# Altium PCB PCB封装.PcbDoc
Units mil, origin at the board's own origin, x right, y up, seen from the top; angles counter-clockwise.
Board outline 6000 x 4000 mil, 2 copper layers (Top, Bottom), stack 12.7 mil thick; 1 components, 0 nets, 26 pads, 0 vias.
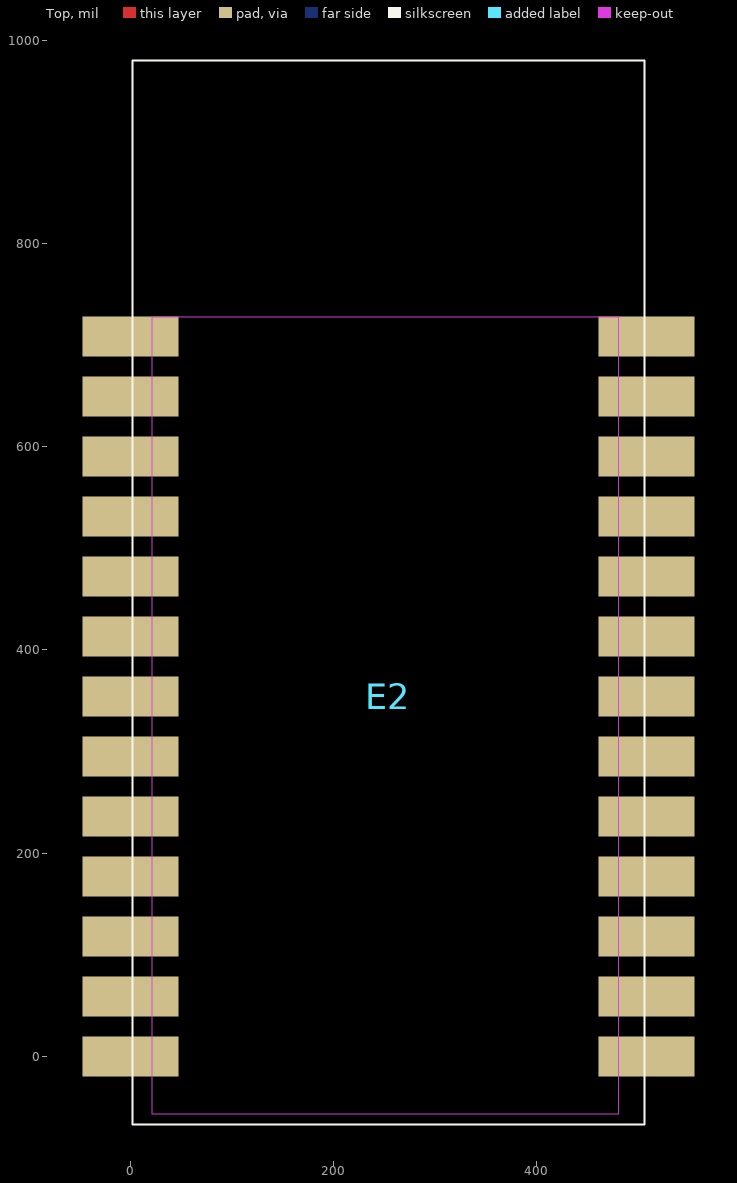
[diagram p0: Top view]
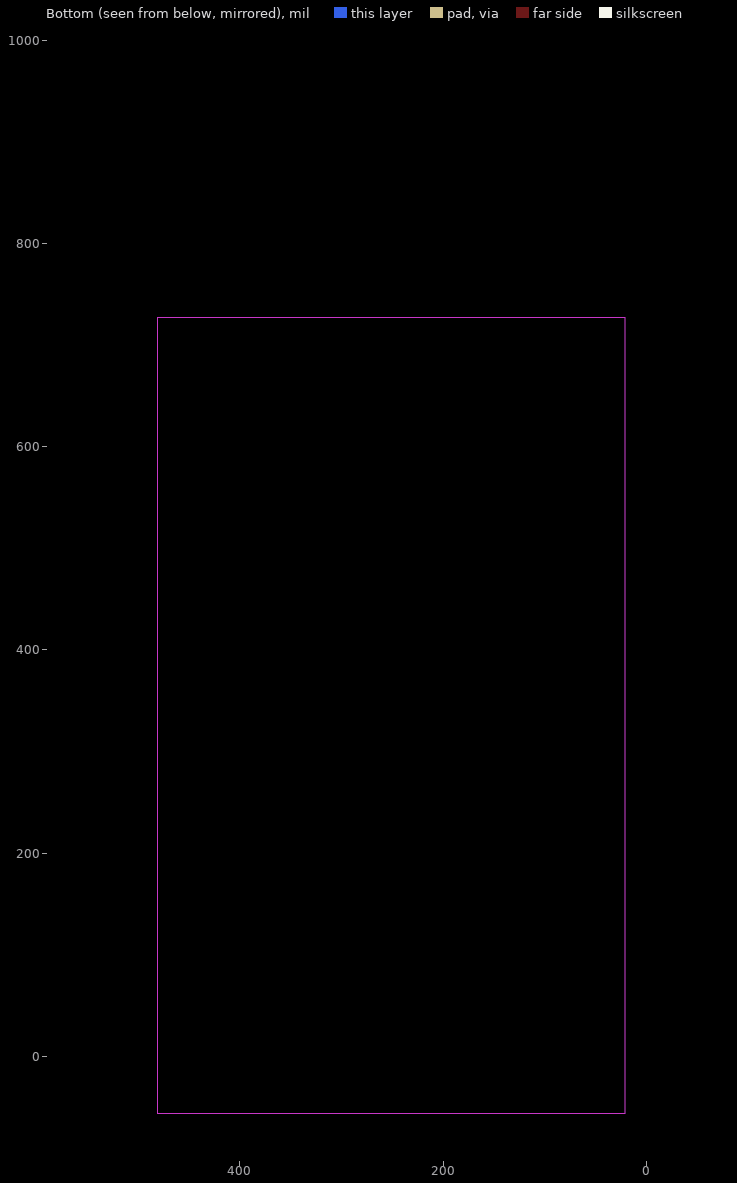
[diagram p1: Bottom view, seen from below]

## Layer stack, top to bottom
Solder Mask Top: solder mask 0.4, Solder Resist, Dk 3.5
Top: signal copper 1.35
Dielectric 1: dielectric 10, FR-4, Dk 4.3
Bottom: signal copper 1.35
Solder Mask Bottom: solder mask 0.4, Solder Resist, Dk 3.5

## Board outline
-27337.13,-26639.03 -21337.13,-26639.03 -21337.13,-22639.03 -27337.13,-22639.03

## Design rules (kind name [scope] priority, off if disabled: settings)
Clearance "'Default' PADS rule_17" [All] p1: gap=6
Clearance "'Default' PADS rule_16" [InPolygon vs InPolygon] p2: gap=7.87
Clearance "'Default' PADS rule_15" [All] p3: gap=6
ComponentClearance "'Default' PADS rule_12" [All] p1: gap=0 collisioncheckmode=3 verticalgap=10 showdistances=FALSE
FlightTimeFalling "'Default' PADS rule_10" [All] p1: maximum=10.00
FlightTimeRising "'Default' PADS rule_9" [All] p1: maximum=10.00
Length "'Default' PADS rule_5" [All] p1: maxlimit=50000 minlimit=0
MatchedLengths "'Default' PADS rule_11" [InNetClass('All Nets')] p1: tolerance=200 checknetsindiffpair=TRUE checkdiffpairvsdiffpair=TRUE checkothers=TRUE
MaxMinImpedance "'Default' PADS rule_8" [All] p1: minimum=50.00 maximum=150.0
ParallelSegment "'Default' PADS rule_7" [All] p1: limit=1000 gap=200
ParallelSegment "'Default' PADS rule_6" [All] p2: limit=1000 gap=200
PlaneClearance "'Default' PADS rule_14" [All] p1: clearance=7.87
PlaneConnect "Power Plane Connect Style - Via from round thru-hole global defaults" [IsVia] p1: planeconnectstyle=Direct reliefexpansion=20 reliefentries=4 reliefconductorwidth=15 reliefairgap=10
PlaneConnect "Power Plane Connect Style - Round thru-hole pad from global defaults" [IsPad And OnMultiLayer And (PadShape_MidLayer1 = 'Round') And (PadXSize_MidLayer1 = PadYSize_MidLayer1)] p2: planeconnectstyle=Direct reliefexpansion=20 reliefentries=4 reliefconductorwidth=15 reliefairgap=10
PlaneConnect "Power Plane Connect Style - Square thru-hole pad from global defaults" [IsPad And OnMultiLayer And ((PadShape_MidLayer1 = 'Rectangular') Or (PadShape_MidLayer1 = 'Octagonal') Or (PadShape_MidLayer1 = 'Rounded Rectangle')) And (PadXSize_MidLayer1 = PadYSize_MidLayer1)] p3: planeconnectstyle=Direct reliefexpansion=20 reliefentries=4 reliefconductorwidth=15 reliefairgap=10
PlaneConnect "Power Plane Connect Style - Rect thru-hole pad from global defaults" [IsPad And OnMultiLayer And ((PadShape_MidLayer1 = 'Rectangular') Or (PadShape_MidLayer1 = 'Octagonal') Or (PadShape_MidLayer1 = 'Rounded Rectangle')) And (PadXSize_MidLayer1 <> PadYSize_MidLayer1)] p4: planeconnectstyle=Direct reliefexpansion=20 reliefentries=4 reliefconductorwidth=15 reliefairgap=10
PlaneConnect "Power Plane Connect Style - Square-rect thru-hole pad from global defaults" [IsPad And OnMultiLayer And (PadShape_MidLayer1 = 'Rounded Rectangle') And (PadXSize_MidLayer1 = PadYSize_MidLayer1) And (Pad_CornerRadius_MidLayer1 = '0%')] p5: planeconnectstyle=Direct reliefexpansion=20 reliefentries=4 reliefconductorwidth=15 reliefairgap=10
PlaneConnect "Power Plane Connect Style - Oval thru-hole pad from global defaults" [IsPad And OnMultiLayer And (PadShape_MidLayer1 = 'Round') And (PadXSize_MidLayer1 <> PadYSize_MidLayer1)] p6: planeconnectstyle=Direct reliefexpansion=20 reliefentries=4 reliefconductorwidth=15 reliefairgap=10
PlaneConnect "Power Plane Connect Style - Round-oval thru-hole pad from global defaults" [IsPad And OnMultiLayer And (PadShape_MidLayer1 = 'Rounded Rectangle') And (PadXSize_MidLayer1 = PadYSize_MidLayer1) And (Pad_CornerRadius_MidLayer1 = '100%')] p7: planeconnectstyle=Direct reliefexpansion=20 reliefentries=4 reliefconductorwidth=15 reliefairgap=10
PolygonConnect "Polygon Connect Style - Bottom Round SMD from global defaults" [IsSMTPin And (PadShape_BottomLayer = 'Round') And (PadXSize_BottomLayer = PADYSize_BottomLayer) vs Layer = 'Bottom'] p1: connectstyle=Direct reliefconductorwidth=10 reliefentries=4 polygonreliefangle="45 Angle" airgapwidth=10
PolygonConnect "Polygon Connect Style - Top Round SMD from global defaults" [IsSMTPin And (PadShape_TopLayer = 'Round') And (PadXSize_TopLayer = PADYSize_TopLayer) vs Layer = 'Top'] p2: connectstyle=Direct reliefconductorwidth=10 reliefentries=4 polygonreliefangle="45 Angle" airgapwidth=10
PolygonConnect "Polygon Connect Style - Bottom Square SMD from global defaults 1" [IsSMTPin And (PadShape_BottomLayer = 'Rectangular') And (PadXSize_BottomLayer = PADYSize_BottomLayer) vs Layer = 'Bottom'] p3: connectstyle=Direct reliefconductorwidth=10 reliefentries=4 polygonreliefangle="45 Angle" airgapwidth=10
PolygonConnect "Polygon Connect Style - Bottom Square SMD from global defaults 2" [IsSMTPin And (PadShape_BottomLayer = 'Octagonal') And (PadXSize_BottomLayer = PADYSize_BottomLayer) vs Layer = 'Bottom'] p4: connectstyle=Direct reliefconductorwidth=10 reliefentries=4 polygonreliefangle="45 Angle" airgapwidth=10
PolygonConnect "Polygon Connect Style - Bottom Square SMD from global defaults 3" [IsSMTPin And (PadShape_BottomLayer = 'Rounded Rectangle') And (PadXSize_BottomLayer = PADYSize_BottomLayer) vs Layer = 'Bottom'] p5: connectstyle=Direct reliefconductorwidth=10 reliefentries=4 polygonreliefangle="45 Angle" airgapwidth=10
PolygonConnect "Polygon Connect Style - Top Square SMD from global defaults 1" [IsSMTPin And (PadShape_TopLayer = 'Rectangular') And (PadXSize_TopLayer = PADYSize_TopLayer) vs Layer = 'Top'] p6: connectstyle=Direct reliefconductorwidth=10 reliefentries=4 polygonreliefangle="45 Angle" airgapwidth=10
PolygonConnect "Polygon Connect Style - Top Square SMD from global defaults 2" [IsSMTPin And (PadShape_TopLayer = 'Octagonal') And (PadXSize_TopLayer = PADYSize_TopLayer) vs Layer = 'Top'] p7: connectstyle=Direct reliefconductorwidth=10 reliefentries=4 polygonreliefangle="45 Angle" airgapwidth=10
PolygonConnect "Polygon Connect Style - Top Square SMD from global defaults 3" [IsSMTPin And (PadShape_TopLayer = 'Rounded Rectangle') And (PadXSize_TopLayer = PADYSize_TopLayer) vs Layer = 'Top'] p8: connectstyle=Direct reliefconductorwidth=10 reliefentries=4 polygonreliefangle="45 Angle" airgapwidth=10
PolygonConnect "Polygon Connect Style - Bottom Rect SMD from global defaults 1" [IsSMTPin And (PadShape_BottomLayer = 'Rectangular') And (PadXSize_BottomLayer <> PADYSize_BottomLayer) vs Layer = 'Bottom'] p9: connectstyle=Direct reliefconductorwidth=10 reliefentries=4 polygonreliefangle="45 Angle" airgapwidth=10
PolygonConnect "Polygon Connect Style - Bottom Rect SMD from global defaults 2" [IsSMTPin And (PadShape_BottomLayer = 'Octagonal') And (PadXSize_BottomLayer <> PADYSize_BottomLayer) vs Layer = 'Bottom'] p10: connectstyle=Direct reliefconductorwidth=10 reliefentries=4 polygonreliefangle="45 Angle" airgapwidth=10
PolygonConnect "Polygon Connect Style - Bottom Rect SMD from global defaults 3" [IsSMTPin And (PadShape_BottomLayer = 'Rounded Rectangle') And (PadXSize_BottomLayer <> PADYSize_BottomLayer) vs Layer = 'Bottom'] p11: connectstyle=Direct reliefconductorwidth=10 reliefentries=4 polygonreliefangle="45 Angle" airgapwidth=10
PolygonConnect "Polygon Connect Style - Bottom Square-rect SMD pad from global defaults" [IsSMTPin And (PadShape_BottomLayer = 'Rounded Rectangle') And (PadXSize_BottomLayer = PADYSize_BottomLayer) And (Pad_CornerRadius_BottomLayer = '0%') vs Layer = 'Bottom'] p12: connectstyle=Direct reliefconductorwidth=10 reliefentries=4 polygonreliefangle="45 Angle" airgapwidth=10
PolygonConnect "Polygon Connect Style - Top Rect SMD from global defaults 1" [IsSMTPin And (PadShape_TopLayer = 'Rectangular') And (PadXSize_TopLayer <> PADYSize_TopLayer) vs Layer = 'Top'] p13: connectstyle=Direct reliefconductorwidth=10 reliefentries=4 polygonreliefangle="45 Angle" airgapwidth=10
PolygonConnect "Polygon Connect Style - Top Rect SMD from global defaults 2" [IsSMTPin And (PadShape_TopLayer = 'Octagonal') And (PadXSize_TopLayer <> PADYSize_TopLayer) vs Layer = 'Top'] p14: connectstyle=Direct reliefconductorwidth=10 reliefentries=4 polygonreliefangle="45 Angle" airgapwidth=10
PolygonConnect "Polygon Connect Style - Top Rect SMD from global defaults 3" [IsSMTPin And (PadShape_TopLayer = 'Rounded Rectangle') And (PadXSize_TopLayer <> PADYSize_TopLayer) vs Layer = 'Top'] p15: connectstyle=Direct reliefconductorwidth=10 reliefentries=4 polygonreliefangle="45 Angle" airgapwidth=10
PolygonConnect "Polygon Connect Style - Top Square-rect SMD pad from global defaults" [IsSMTPin And (PadShape_TopLayer = 'Rounded Rectangle') And (PadXSize_TopLayer = PADYSize_TopLayer) And (Pad_CornerRadius_TopLayer = '0%') vs Layer = 'Top'] p16: connectstyle=Direct reliefconductorwidth=10 reliefentries=4 polygonreliefangle="45 Angle" airgapwidth=10
PolygonConnect "Polygon Connect Style - Bottom Oval SMD from global defaults" [IsSMTPin And (PadShape_BottomLayer = 'Round') And (PadXSize_BottomLayer <> PADYSize_BottomLayer) vs Layer = 'Bottom'] p17: connectstyle=Direct reliefconductorwidth=10 reliefentries=4 polygonreliefangle="45 Angle" airgapwidth=10
PolygonConnect "Polygon Connect Style - Bottom Round-oval SMD pad from global defaults" [IsSMTPin And (PadShape_BottomLayer = 'Rounded Rectangle') And (PadXSize_BottomLayer = PADYSize_BottomLayer) And (Pad_CornerRadius_BottomLayer = '100%') vs Layer = 'Bottom'] p18: connectstyle=Direct reliefconductorwidth=10 reliefentries=4 polygonreliefangle="45 Angle" airgapwidth=10
PolygonConnect "Polygon Connect Style - Top Oval SMD from global defaults" [IsSMTPin And (PadShape_TopLayer = 'Round') And (PadXSize_TopLayer <> PADYSize_TopLayer) vs Layer = 'Top'] p19: connectstyle=Direct reliefconductorwidth=10 reliefentries=4 polygonreliefangle="45 Angle" airgapwidth=10
PolygonConnect "Polygon Connect Style - Top Round-oval SMD pad from global defaults" [IsSMTPin And (PadShape_TopLayer = 'Rounded Rectangle') And (PadXSize_TopLayer = PADYSize_TopLayer) And (Pad_CornerRadius_TopLayer = '100%') vs Layer = 'Top'] p20: connectstyle=Direct reliefconductorwidth=10 reliefentries=4 polygonreliefangle="45 Angle" airgapwidth=10
PolygonConnect "Polygon Connect Style - Via from round thru-hole global defaults_18" [IsVia] p21: connectstyle=Direct reliefconductorwidth=15 reliefentries=4 polygonreliefangle="45 Angle" airgapwidth=10
PolygonConnect "Polygon Connect Style - Bottom Round thru-hole pad from global defaults" [IsPad And OnMultiLayer And (PadShape_BottomLayer = 'Round') And (PadXSize_BottomLayer = PADYSize_BottomLayer) vs Layer = 'Bottom'] p22: connectstyle=Direct reliefconductorwidth=15 reliefentries=4 polygonreliefangle="45 Angle" airgapwidth=10
PolygonConnect "Polygon Connect Style - Via from round thru-hole global defaults" [IsVia] p23: connectstyle=Direct reliefconductorwidth=15 reliefentries=4 polygonreliefangle="45 Angle" airgapwidth=10
PolygonConnect "Polygon Connect Style - Top Round thru-hole pad from global defaults" [IsPad And OnMultiLayer And (PadShape_TopLayer = 'Round') And (PadXSize_TopLayer = PADYSize_TopLayer) vs Layer = 'Top'] p24: connectstyle=Direct reliefconductorwidth=15 reliefentries=4 polygonreliefangle="45 Angle" airgapwidth=10
PolygonConnect "Polygon Connect Style - Bottom Square thru-hole pad from global defaults" [IsPad And OnMultiLayer And ((PadShape_BottomLayer = 'Rectangular') Or (PadShape_BottomLayer = 'Octagonal') Or (PadShape_BottomLayer = 'Rounded Rectangle')) And (PadXSize_BottomLayer = PADYSize_BottomLayer) vs Layer = 'Bottom'] p25: connectstyle=Direct reliefconductorwidth=15 reliefentries=4 polygonreliefangle="45 Angle" airgapwidth=10
PolygonConnect "Polygon Connect Style - Top Square thru-hole pad from global defaults" [IsPad And OnMultiLayer And ((PadShape_TopLayer = 'Rectangular') Or (PadShape_TopLayer = 'Octagonal') Or (PadShape_TopLayer = 'Rounded Rectangle')) And (PadXSize_TopLayer = PADYSize_TopLayer) vs Layer = 'Top'] p26: connectstyle=Direct reliefconductorwidth=15 reliefentries=4 polygonreliefangle="45 Angle" airgapwidth=10
PolygonConnect "Polygon Connect Style - Bottom Rect thru-hole pad from global defaults" [IsPad And OnMultiLayer And ((PadShape_BottomLayer = 'Rectangular') Or (PadShape_BottomLayer = 'Octagonal') Or (PadShape_BottomLayer = 'Rounded Rectangle')) And (PadXSize_BottomLayer <> PADYSize_BottomLayer) vs Layer = 'Bottom'] p27: connectstyle=Direct reliefconductorwidth=15 reliefentries=4 polygonreliefangle="45 Angle" airgapwidth=10
PolygonConnect "Polygon Connect Style - Bottom Square-rect thru-hole pad from global defaults" [IsPad And OnMultiLayer And (PadShape_BottomLayer = 'Rounded Rectangle') And (PadXSize_BottomLayer = PADYSize_BottomLayer) And (Pad_CornerRadius_BottomLayer = '0%') vs Layer = 'Bottom'] p28: connectstyle=Direct reliefconductorwidth=15 reliefentries=4 polygonreliefangle="45 Angle" airgapwidth=10
PolygonConnect "Polygon Connect Style - Top Rect thru-hole pad from global defaults" [IsPad And OnMultiLayer And ((PadShape_TopLayer = 'Rectangular') Or (PadShape_TopLayer = 'Octagonal') Or (PadShape_TopLayer = 'Rounded Rectangle')) And (PadXSize_TopLayer <> PADYSize_TopLayer) vs Layer = 'Top'] p29: connectstyle=Direct reliefconductorwidth=15 reliefentries=4 polygonreliefangle="45 Angle" airgapwidth=10
PolygonConnect "Polygon Connect Style - Top Square-rect thru-hole pad from global defaults" [IsPad And OnMultiLayer And (PadShape_TopLayer = 'Rounded Rectangle') And (PadXSize_TopLayer = PADYSize_TopLayer) And (Pad_CornerRadius_TopLayer = '0%') vs Layer = 'Top'] p30: connectstyle=Direct reliefconductorwidth=15 reliefentries=4 polygonreliefangle="45 Angle" airgapwidth=10
PolygonConnect "Polygon Connect Style - Bottom Oval thru-hole pad from global defaults" [IsPad And OnMultiLayer And (PadShape_BottomLayer = 'Round') And (PadXSize_BottomLayer <> PADYSize_BottomLayer) vs Layer = 'Bottom'] p31: connectstyle=Direct reliefconductorwidth=15 reliefentries=4 polygonreliefangle="45 Angle" airgapwidth=10
PolygonConnect "Polygon Connect Style - Bottom Round-oval thru-hole pad from global defaults" [IsPad And OnMultiLayer And (PadShape_BottomLayer = 'Rounded Rectangle') And (PadXSize_BottomLayer = PADYSize_BottomLayer) And (Pad_CornerRadius_BottomLayer = '100%') vs Layer = 'Bottom'] p32: connectstyle=Direct reliefconductorwidth=15 reliefentries=4 polygonreliefangle="45 Angle" airgapwidth=10
PolygonConnect "Polygon Connect Style - Top Oval thru-hole pad from global defaults" [IsPad And OnMultiLayer And (PadShape_TopLayer = 'Round') And (PadXSize_TopLayer <> PADYSize_TopLayer) vs Layer = 'Top'] p33: connectstyle=Direct reliefconductorwidth=15 reliefentries=4 polygonreliefangle="45 Angle" airgapwidth=10
PolygonConnect "Polygon Connect Style - Top Round-oval thru-hole pad from global defaults" [IsPad And OnMultiLayer And (PadShape_TopLayer = 'Rounded Rectangle') And (PadXSize_TopLayer = PADYSize_TopLayer) And (Pad_CornerRadius_TopLayer = '100%') vs Layer = 'Top'] p34: connectstyle=Direct reliefconductorwidth=15 reliefentries=4 polygonreliefangle="45 Angle" airgapwidth=10
PolygonConnect [All] p35: connectstyle=Relief reliefconductorwidth=10 reliefentries=4 polygonreliefangle="90 Angle" airgapwidth=10
RoutingLayers "'Default' PADS rule_3" [All] p1: top layer_v5=TRUE bottom layer_v5=TRUE
RoutingPriority "'Default' PADS rule_2" [All] p1: routingpriority=3
RoutingTopology "'Default' PADS rule" [All] p1: topology=Shortest
RoutingVias "'Default' PADS rule_4" [All] p1: holewidth=9.06 width=19.68 viastyle="Through Hole" minholewidth=9.06 minwidth=19.68 maxholewidth=9.06 maxwidth=19.68
SolderMaskExpansion [All] p1: expansion=4
Width "'Default' PADS rule_13" [All] p1: maxlimit=6 minlimit=6 preferedwidth=6
23 further rules are at their usual default settings.

## Components (designator, comment, footprint, x,y, rotation, side; value= is the part's Value field where it differs from the comment)
E2 "CC2640A" CC2640A 0,708.66 r90 top

## Footprints (in the part's own frame and the unit in brackets; to place one, negate y for a bottom-side part, rotate by r counter-clockwise, add the part's x,y. Pads: shape width x height; smd on the part's side, far side on the other; paste and mask are expansions set on the pad)
CC2640A [mm]
  rect 1x2.4 smd: 1(0,0) 2(-1.5,0) 3(-3,0) 4(-4.5,0) 5(-6,0) 6(-7.5,0) 7(-9,0) 8(-10.5,0) 9(-12,0) 10(-13.5,0) 11(-15,0) 12(-16.5,0) 13(-18,0) 14(-18,-12.9) 15(-16.5,-12.9) 16(-15,-12.9) 17(-13.5,-12.9) 18(-12,-12.9) 19(-10.5,-12.9) 20(-9,-12.9) 21(-7.5,-12.9) 22(-6,-12.9) 23(-4.5,-12.9) 24(-3,-12.9) 25(-1.5,-12.9) 26(0,-12.9)
  silkscreen extent -19.7,-12.85 6.9,-0.05

## Nets (pads, with @x,y where several pads share a name; then routed paths per layer and width w, separated by ;. In a path a pad name is that pad's centre, name@x,y a point inside that pad or via, vN(x,y) a via of type N, cw(c..) or ccw(c..) an arc to the next point about the centre after c; other vN are vias at no path point)
pads on no net: E2.1 E2.2 E2.3 E2.4 E2.5 E2.6 E2.7 E2.8 E2.9 E2.10 E2.11 E2.12 E2.13 E2.14 E2.15 E2.16 E2.17 E2.18 E2.19 E2.20 E2.21 E2.22 E2.23 E2.24 E2.25 E2.26

## Keep-outs
Keep-Out Layer:
  region: 21.14,727.51 21.14,-56.74 480.98,-56.74 480.98,727.51 21.14,727.51